# EAGLE board resourciboard - shift (EAGLE 9.6.2)
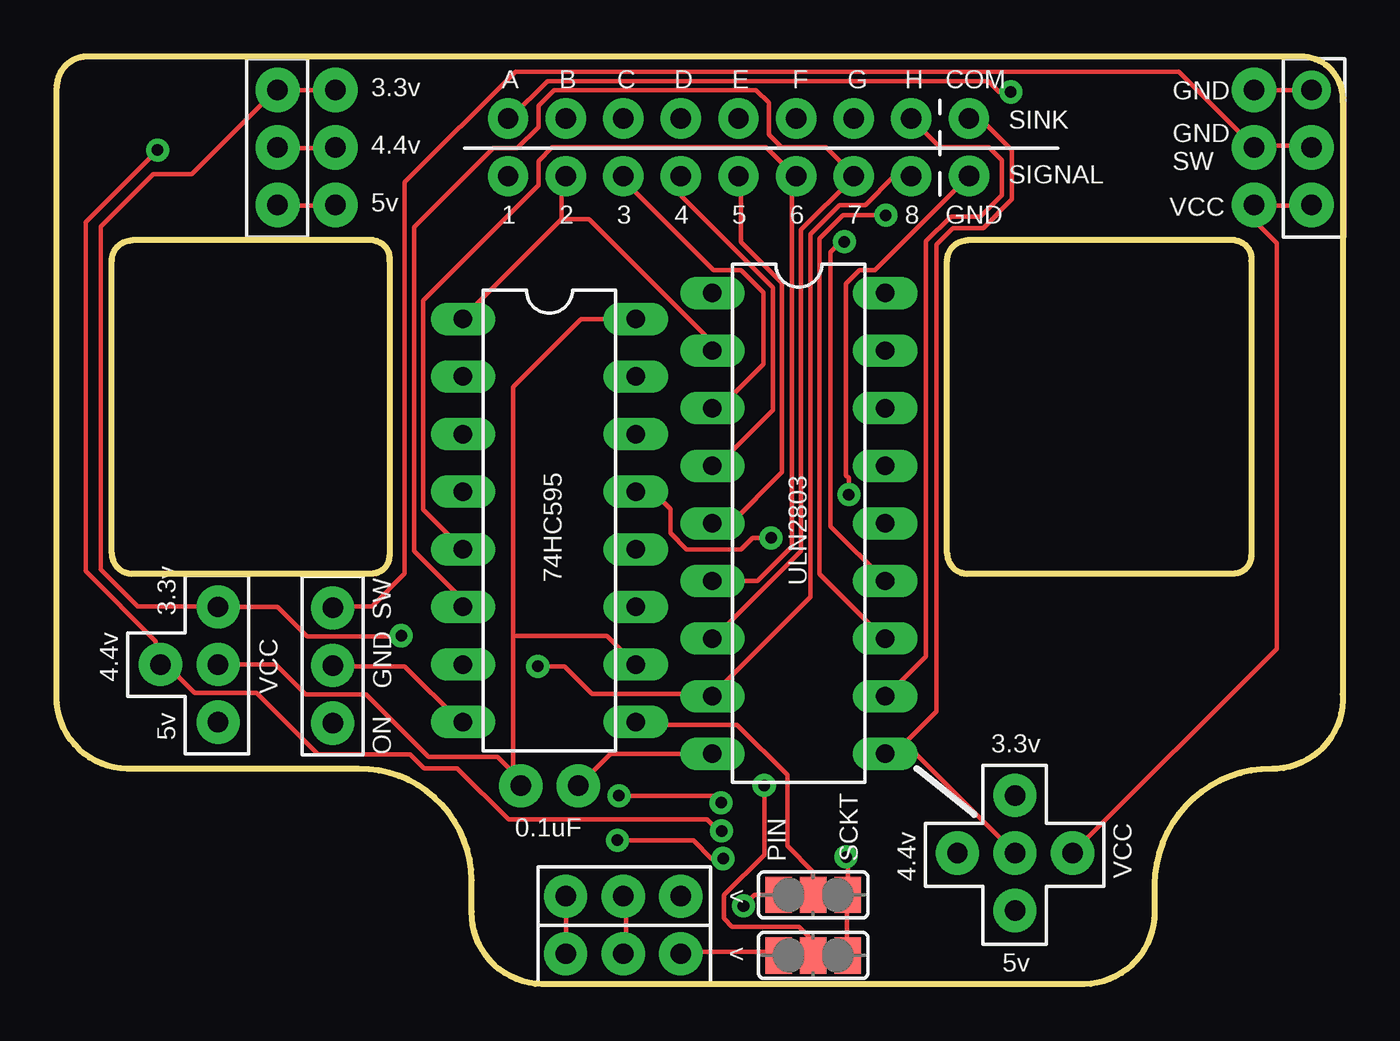
[diagram p0: board, top side]
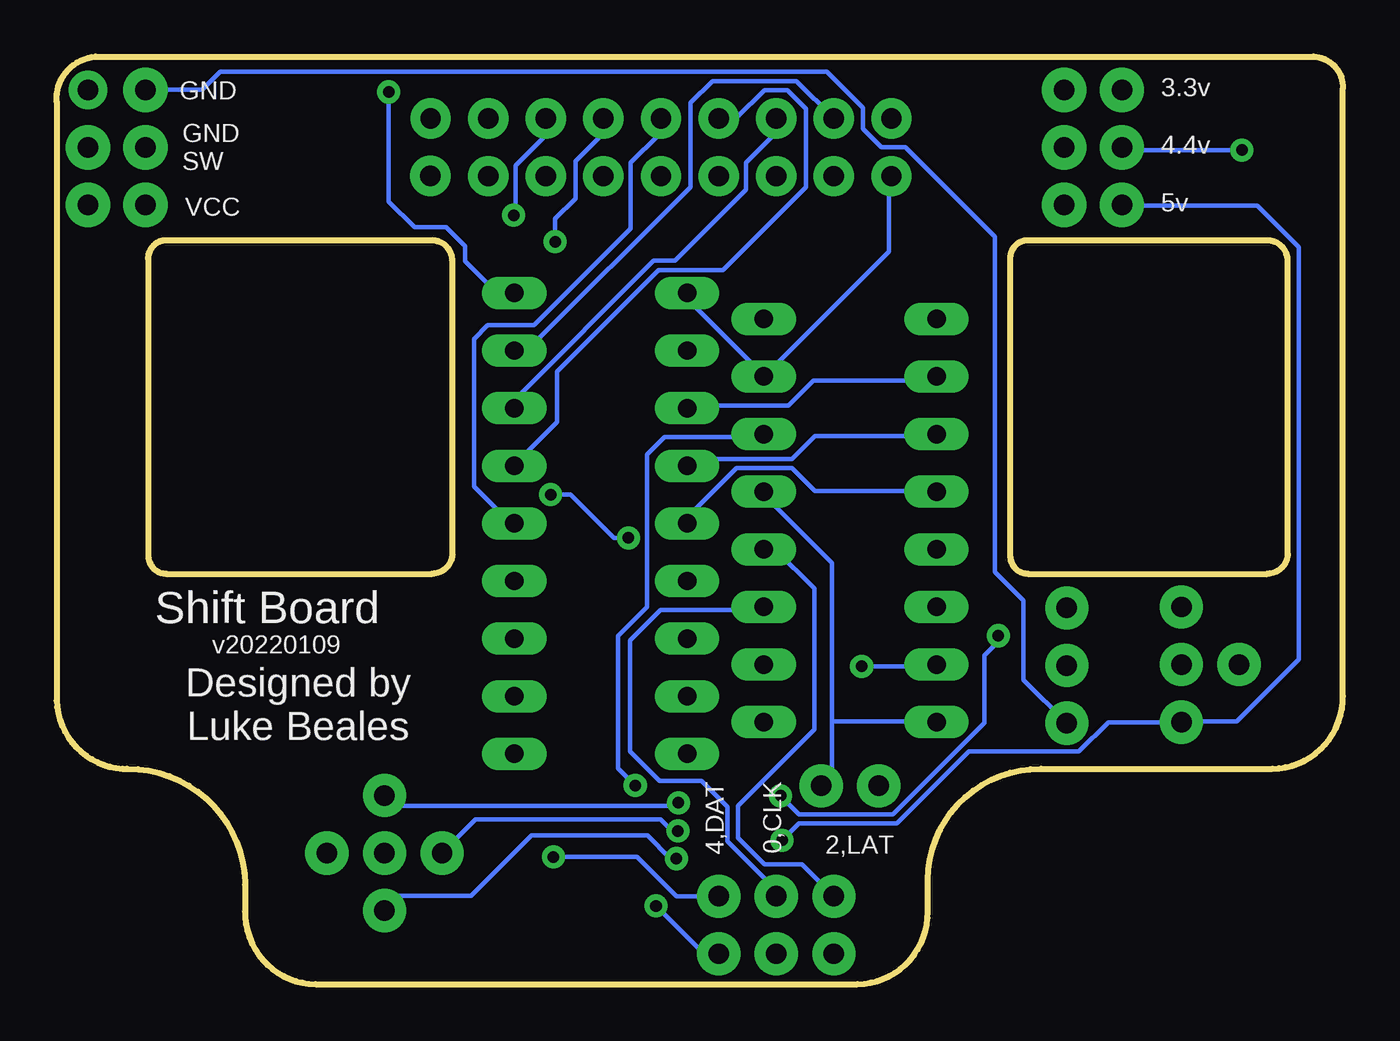
[diagram p1: board, bottom side, seen from below]

Size 56.71 x 40.9 mm. Coordinates in mm from the lower left corner, seen from the top.
Outline: 56.7,38.9 56.7,12.8 arc-90 53.8,9.5 53.6,9.5 arc90 48.4,4.4 48.4,3.2 arc-90 45.3,0 21.4,0 arc-90 18.3,3.2 18.3,4.6 arc90 13.3,9.5 3.1,9.5 arc-90 0,12.7 0,39.5 arc-90 1.3,40.9 55,40.9 arc-90 56.7,38.9
Outline: 51.97,32.8 arc-90 52.67,31.9 52.67,18.9 arc-90 51.87,18.1 40.16,18.1 arc-90 39.26,19 39.26,31.9 arc-90 40.16,32.8 51.97,32.8
Outline: 13.97,32.8 arc-90 14.67,31.9 14.67,18.9 arc-90 13.87,18.1 3.33,18.1 arc-90 2.43,19 2.43,31.9 arc-90 3.33,32.8 13.97,32.8
Copper layers (1*16): Top 0.035mm / dielectric 1.5mm / Bottom 0.035mm
Design rules "SparkFun": minimum track width 8mil, minimum drill 20mil, track to track 8mil, track to pad 8mil, pad to pad 8mil, via to via 8mil, smd to smd 8mil, copper to edge 10mil, drill to drill 8mil, minimum pad ring 12mil, minimum via ring 10mil, stop-mask expansion 4mil, vias tented up to drill 25mil, thermal gap 10mil

## Footprints (pad centres in the part's own frame; a part is rotated, then mirrored left to right if it is on the bottom)
DIL16 = drill 0.813 long: 1 -8.89,-3.81; 2 -6.35,-3.81; 3 -3.81,-3.81; 4 -1.27,-3.81; 5 1.27,-3.81; 6 3.81,-3.81; 7 6.35,-3.81; 8 8.89,-3.81; 9 8.89,3.81; 10 6.35,3.81; 11 3.81,3.81; 12 1.27,3.81; 13 -1.27,3.81; 14 -3.81,3.81; 15 -6.35,3.81; 16 -8.89,3.81
SJ_2 = smd 1.168 x 1.6: 1 -1.524,0; 2 0,0; 3 1.524,0
DIL18 = drill 0.813 long: 1 -10.16,-3.81; 2 -7.62,-3.81; 3 -5.08,-3.81; 4 -2.54,-3.81; 5 0,-3.81; 6 2.54,-3.81; 7 5.08,-3.81; 8 7.62,-3.81; 9 10.16,-3.81; 10 10.16,3.81; 11 7.62,3.81; 12 5.08,3.81; 13 2.54,3.81; 14 0,3.81; 15 -2.54,3.81; 16 -5.08,3.81; 17 -7.62,3.81; 18 -10.16,3.81

## Placement (x,y rotation side)
E$1  [DIL16]  21.72,20.45 270 top
E$2  [SJ_2]  33.36,1.27 0 top
E$3  [DIL18]  32.72,20.32 270 top
E$4  [SJ_2]  33.36,3.94 0 top

## Library data of the parts
E$1 = 74xx-us
E$2 E$4 = jumper
E$3 = ic-package

## Nets
1: E$1.15 E$3.1
2: E$1.1 E$3.2
3: E$1.2 E$3.3
4: E$1.3 E$3.4
5: E$1.4 E$3.5
6: E$1.5 E$3.6
7: E$1.6 E$3.7
8: E$1.7 E$3.8
A: E$3.18
B: E$3.17
C: E$3.16
CHIP_GND: E$1.8 E$1.13 E$3.9
CHIP_VCC: E$1.10 E$1.16
CLOCK: E$1.11
COMMON: E$3.10
D: E$3.15
E: E$3.14
F: E$3.13
G: E$3.12
H: E$3.11
IN: E$1.14 E$2.2
LATCH: E$1.12
OUT: E$1.9 E$4.2
X: E$2.1 E$4.1
Y: E$2.3 E$4.3

## Tracks (layer width: path | path; a pad name or v marks a point on that pad's centre or on a via)
1  (via drill 0.9 pad 1.78)
  Bottom 0.203: 25.51,26.82 20.02,32.31 20.02,35.56 v19.9,35.63 | 25.51,26.82 28.76,30.07 28.76,30.48 E$3.1 | 25.51,26.82 E$1.15
2  (via drill 0.9 pad 1.78)
  Top 0.203: 22.25,33.73 22.25,35.56 v22.44,35.63 | 22.25,33.73 17.99,29.46 E$1.1 | 22.25,33.73 23.47,33.73 28.76,28.45 28.76,28.04 E$3.2
3  (via drill 0.9 pad 1.78)
  Top 0.203: v24.98,35.63 24.98,35.48 28.96,31.5 30.18,31.5 31.17,30.5 31.17,27.36 29.21,25.4 E$3.3
  Bottom 0.203: E$3.3 28.78,25.53 24.44,25.53 23.35,26.62 17.99,26.62 E$1.2
3.3V  (via drill 0.51, 0.9 pad 1.91, 0.9 pad 1.96)
  Top 0.203: v12.28,39.44 12.09,39.42 9.86,39.42 v9.74,39.44 9.66,39.42 5.95,35.71 4.25,35.71 1.93,33.4 1.93,18.29 3.56,16.66 7.02,16.66 v7.12,16.64 9.74,16.64 11.04,15.34 15.16,15.34 v15.19,15.37 | v29.29,8 28.98,8.31 v24.79,8.31
  Bottom 0.203: v15.19,15.37 15.19,15.11 15.81,14.5 15.81,11.52 19.83,7.49 23.97,7.49 v24.79,8.31 | v42.25,8.32 41.8,7.87 29.42,7.87 v29.29,8
4  (via drill 0.9 pad 1.78)
  Top 0.203: E$3.4 29.11,22.86 31.58,25.32 31.58,30.71 27.54,34.75 27.54,35.56 v27.52,35.63
  Bottom 0.203: E$1.3 17.99,24.18 23.27,24.18 24.29,23.16 28.55,23.16 28.76,22.96 E$3.4
4.4V  (via drill 0.51, 0.9 pad 1.91, 0.9 pad 1.96)
  Top 0.203: v4.45,36.78 1.27,33.6 1.27,18.21 4.37,15.11 4.37,14.22 v4.58,14.1 4.83,14.1 6.09,12.84 8.81,12.84 11.52,10.13 15.59,10.13 16.19,9.53 17.66,9.53 19.92,7.27 28.68,7.27 29.19,6.76 v29.32,6.76 | v12.28,36.9 12.23,36.85 9.79,36.85 v9.74,36.9
  Bottom 0.203: v4.45,36.78 9.66,36.78 v9.74,36.9 | v29.32,6.76 29.57,6.76 30.08,7.27 38.23,7.27 v39.71,5.79
5  (via drill 0.9 pad 1.78)
  Top 0.203: v30.06,35.63 30.18,35.56 30.18,32.72 31.98,30.91 31.98,22.58 29.72,20.32 E$3.5
  Bottom 0.203: E$1.4 17.99,21.74 23.27,21.74 24.29,22.76 26.73,22.76 28.76,20.73 28.76,20.32 E$3.5
5V  (via drill 0.51, 0.9 pad 1.91, 0.9 pad 1.96)
  Top 0.203: v12.28,34.36 12.09,34.34 9.86,34.34 v9.74,34.36 | v24.72,6.35 28.07,6.35 28.88,5.54 v29.39,5.54
  Bottom 0.203: v9.74,34.36 9.66,34.34 3.76,34.34 1.93,32.51 1.93,14.33 4.68,11.58 7.02,11.58 v7.12,11.55 10.35,11.55 11.65,10.26 16.49,10.26 19.66,7.08 23.98,7.08 v24.72,6.35 | v29.39,5.54 29.64,5.54 30.66,6.55 35.77,6.55 38.43,3.89 41.6,3.89 v42.25,3.25
6  (via drill 0.9 pad 1.78)
  Top 0.203: E$3.6 30.89,17.78 32.42,19.3 32.42,35.56 v32.6,35.63 32.42,35.76 31.27,36.91 21.85,36.91 21.24,36.3 21.24,35.23 16.16,30.15 16.16,20.93 17.79,19.3 E$1.5
7  (via drill 0.9 pad 1.78)
  Top 0.203: E$3.7 28.96,15.24 32.82,19.1 32.82,33.27 35.06,35.51 35.06,35.56 v35.14,35.63 35.06,35.76 33.91,36.91 31.96,36.91 31.4,37.47 31.4,38.86 30.84,39.42 21.93,39.42 21.24,38.73 21.24,37.8 20.3,36.85 19.23,36.85 15.75,33.38 15.75,19.1 17.79,17.07 17.79,16.66 E$1.6
8  (via drill 0.51, 0.9 pad 1.78)
  Top 0.203: v37.68,35.63 36.92,35.63 35.65,34.36 34.51,34.36 33.23,33.08 33.23,17.07 28.96,12.8 E$3.8 28.76,12.8 23.6,12.8 22.38,14.02 v21.21,14.02
  Bottom 0.203: v21.21,14.02 17.99,14.02 E$1.7
A  (via drill 0.51, 0.9 pad 1.78)
  Top 0.203: v42.07,39.34 41.56,39.34 41.08,39.83 21.65,39.83 20.02,38.2 v19.9,38.17
  Bottom 0.203: v42.07,39.34 42.07,34.52 40.92,33.38 39.53,33.38 38.69,32.54 38.69,31.88 37.29,30.48 E$3.18
B  (via drill 0.9 pad 1.78)
  Bottom 0.203: v22.44,38.17 22.46,38.2 24.08,39.83 27.79,39.83 28.76,38.86 28.76,35.15 35.87,28.04 36.48,28.04 E$3.17
C  (via drill 0.9 pad 1.78)
  Bottom 0.203: v24.98,38.17 25.1,38 25.1,37.44 26.32,36.22 26.32,35.03 29.44,31.9 30.38,31.9 36.48,25.81 36.48,25.4 E$3.16
CHIP_GND  (via drill 0.51, 0.9 pad 1.78, 0.9 pad 1.91)
  Top 0.203: v12.17,14.05 12.3,14.02 15.35,14.02 17.79,11.58 E$1.8 | v23,8.75 24.41,10.16 E$3.9 | v40.23,35.64 36.09,31.5 35.4,31.5 34.8,30.9 34.8,22.44 34.93,22.31 v34.93,21.59 | v31.5,19.68 30.68,19.68 30.17,19.18 27.78,19.18 27.06,19.9 27.06,20.96 26.3,21.72 E$1.13
  Bottom 0.203: 23.03,8.75 v23,8.75 23,8.88 22.54,9.34 22.54,11.58 | 22.54,11.58 22.54,18.57 25.51,21.54 E$1.13 | 22.54,11.58 17.99,11.58 E$1.8 | v34.93,21.59 34.04,21.59 32.14,19.68 v31.5,19.68
CHIP_VCC  (via drill 0.9 pad 1.91)
  Top 0.203: v7.12,14.1 9.66,14.1 10.97,12.78 13.64,12.78 16.39,10.03 19.43,10.03 20.46,9 v20.46,8.75 20.43,8.94 20.12,9.25 20.12,15.37 | E$1.10 24.27,15.37 20.12,15.37 | E$1.16 23.12,29.34 20.12,26.34 20.12,15.37
CLOCK  (via drill 0.9 pad 1.91)
  Top 0.203: v24.98,1.34 25.1,1.42 25.1,3.86 v24.98,3.88
  Bottom 0.203: v24.98,3.88 24.98,4.13 27.14,6.29 27.14,7.82 28.28,8.96 30.12,8.96 31.43,10.26 31.43,15.16 30.08,16.51 25.66,16.51 E$1.11
COMMON  (via drill 0.9 pad 1.78, 0.9 pad 1.91)
  Top 0.203: v40.22,38.17 40.73,38.17 42.12,36.77 42.12,34.61 40.86,33.34 39.51,33.34 38.78,32.61 38.78,12.03 36.91,10.16 E$3.10 37.88,10.16 v42.25,5.79
D  (via drill 0.9 pad 1.78)
  Bottom 0.203: v27.52,38.17 27.34,38.2 26.73,38.2 25.51,39.42 24.49,39.42 23.68,38.61 23.68,35.15 27.34,31.5 30.18,31.5 34.65,27.03 34.65,24.79 36.48,22.96 E$3.15
E  (via drill 0.9 pad 1.78)
  Bottom 0.203: v30.06,38.17 30.18,38 30.18,37.44 31.4,36.22 31.4,33.33 35.67,29.06 37.7,29.06 38.31,28.45 38.31,21.95 36.68,20.32 E$3.14
F  (via drill 0.51, 0.9 pad 1.78)
  Top 0.203: v34.73,32.74 34.57,32.74 34.12,32.28 34.12,20.19 E$3.13
  Bottom 0.203: v34.73,32.74 34.73,33.76 33.84,34.65 33.84,36.3 32.62,37.52 32.62,38 v32.6,38.17
G  (via drill 0.51, 0.9 pad 1.78)
  Top 0.203: v36.55,33.91 34.68,33.91 33.63,32.87 33.63,18.09 36.48,15.24 E$3.12
  Bottom 0.203: v36.55,33.91 36.48,33.98 36.48,36.09 35.26,37.31 35.26,38 v35.14,38.17
GND  (via drill 0.9 pad 1.7, 0.9 pad 1.91, 0.9 pad 1.96)
  Top 0.203: v55.33,39.44 55.17,39.42 52.94,39.42 v52.79,39.44
  Bottom 0.203: v12.17,11.51 14.07,13.42 14.07,16.91 15.35,18.19 15.35,32.97 19.28,36.91 20.35,36.91 21.16,37.72 21.16,38.66 22.74,40.23 49.49,40.23 50.29,39.44 v52.79,39.44
GND_SW  (via drill 0.9 pad 1.91, 0.9 pad 1.96)
  Top 0.203: v12.17,16.59 12.3,16.66 13.9,16.66 15.35,18.11 15.35,35.36 20.22,40.23 49.48,40.23 52.73,36.98 v52.79,36.9 52.94,36.98 55.17,36.98 v55.33,36.9
H  (via drill 0.9 pad 1.78)
  Top 0.203: v37.68,38.17 38.95,36.9 41.11,36.9 41.68,36.33 41.68,34.8 40.73,33.85 39.42,33.85 38.33,32.77 38.33,14.45 36.68,12.8 E$3.11
IN  (via drill 0.51)
  Top 0.203: E$2.2 33.36,1.91 32.72,2.54 29.77,2.54 29.42,2.9 29.42,3.94 31.2,5.71 v31.2,8.76
  Bottom 0.203: E$1.14 25.66,24.13 29.91,24.13 30.69,23.36 30.69,16.64 31.96,15.37 31.96,9.53 v31.2,8.76
LATCH  (via drill 0.9 pad 1.91)
  Top 0.203: v22.44,1.34 22.46,1.42 22.46,3.86 v22.44,3.88
  Bottom 0.203: v22.44,3.88 23.84,5.28 25.5,5.28 26.67,6.45 26.67,7.87 23.3,11.24 23.3,17.45 25.03,19.18 E$1.12
OUT
  Top 0.203: E$1.9 25.71,11.56 25.84,11.43 30,11.43 32.21,9.22 32.21,6.1 33.36,4.95 E$4.2
VCC  (via drill 0.9 pad 1.91, 0.9 pad 1.96)
  Top 0.203: v55.33,34.36 55.17,34.34 52.94,34.34 v52.79,34.36 52.79,33.66 53.79,32.67 53.79,14.78 v44.79,5.79
X  (via drill 0.51, 0.9 pad 1.91)
  Top 0.203: v27.52,1.34 27.54,1.42 31.81,1.42 E$2.1 | E$4.1 30.76,3.94 v30.28,3.45
  Bottom 0.203: v30.28,3.45 28.25,1.42 27.61,1.42 27.53,1.34 v27.52,1.34
Y  (via drill 0.51, 0.9 pad 1.91)
  Top 0.203: v34.8,5.61 34.8,5.21 34.88,5.13 E$4.3 34.85,3.86 34.85,1.42 E$2.3
  Bottom 0.203: v27.52,3.88 29.39,3.88 31.12,5.61 v34.8,5.61

## Text on the board
tPlace: 3.3v | A | B | C | D | E | F | G | H | COM | GND | SINK | 4.4v | GND / SW | SIGNAL | 5v | 1 | 2 | 3 | 4 | 5 | 6 | 7 | 8 | GND | VCC | 3.3v | SW | 74HC595 | ULN2803 | 4.4v | VCC | GND | ON | 5v | 3.3v | 0.1uF | PIN | SCKT | 4.4v | VCC | < | < | 5v
bPlace: 3.3v | GND | 4.4v | GND / SW | 5v | VCC | Shift Board | v20220109 | Designed by / Luke Beales | 0,CLK | 4,DAT | 2,LAT